# Altium PCB viper_eagle_rep_plate.PcbDoc
Units mil, origin at the board's own origin, x right, y up, seen from the top; angles counter-clockwise.
Board outline 11236.25 x 3944.87 mil, 2 copper layers (Component Side, Bottom Layer), stack 61.855 mil thick; 65 components, 206 nets, 256 pads, 0 vias.
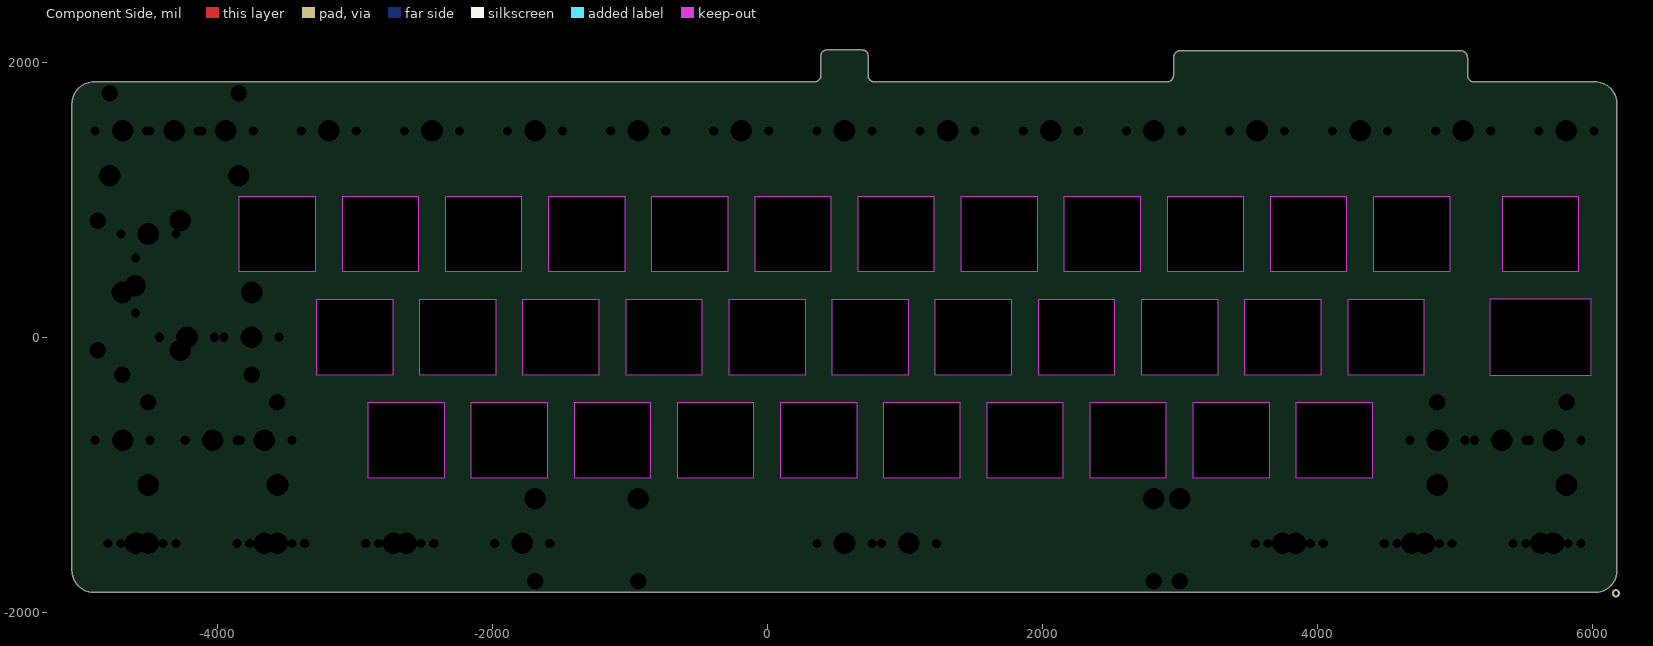
[diagram p0: Component Side view]
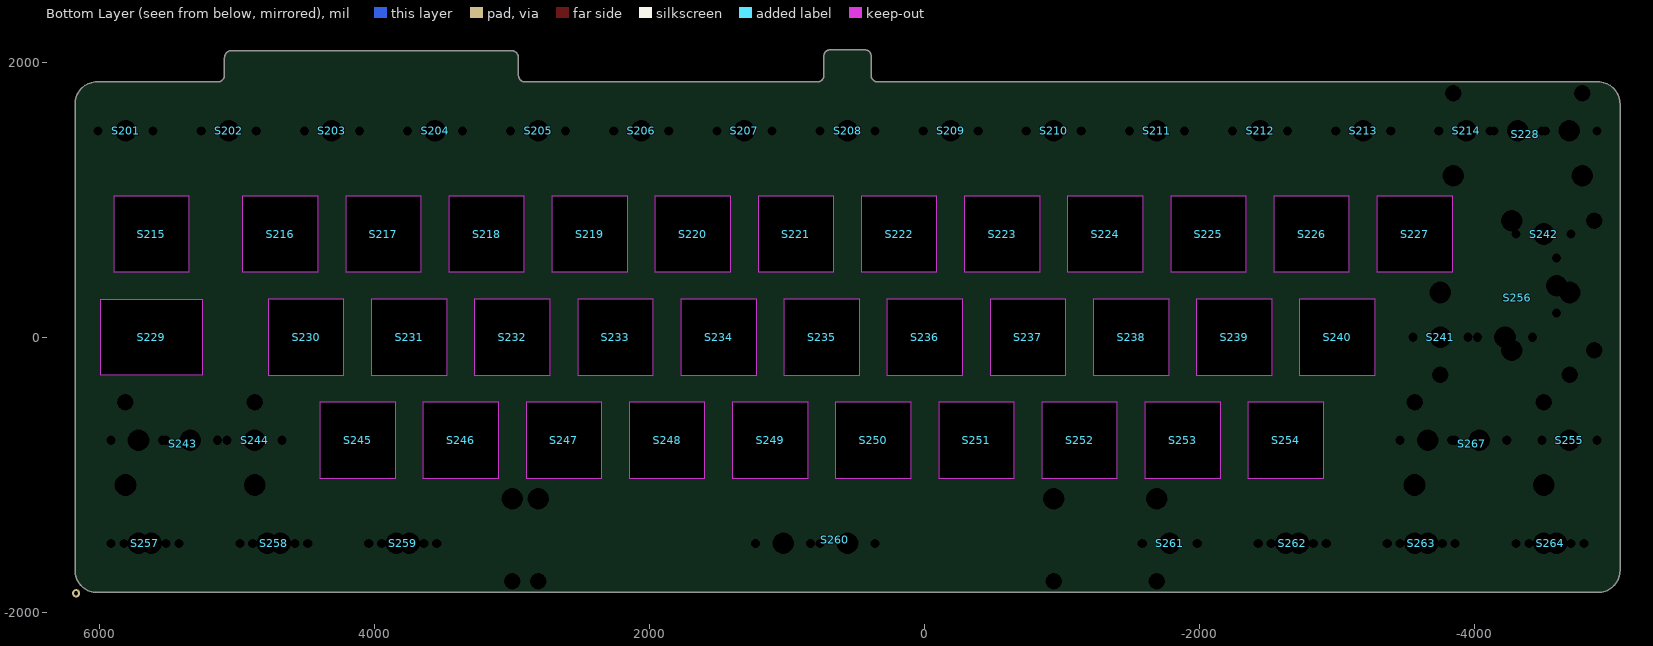
[diagram p1: Bottom Layer view, seen from below]

## Layer stack, top to bottom
Top Solder: solder mask 0.4, Solder Resist, Dk 3.5
Component Side: signal copper 1.4
Dielectric 1: core 59.0551, FR-4, Dk 4.2
Bottom Layer: signal copper 1.4
Solder Side: solder mask 0.4, Solder Resist, Dk 3.5

## Board outline
-5055.63,-1696.89 cw(c-5053.64,-1696.85) -5055.63,-1696.85 -5055.63,1696.85 cw(c-5053.64,1696.85) -5055.63,1696.88 cw(c-4896.16,1696.85) -4896.16,1856.31 cw(c-4896.16,1854.33) -4896.12,1856.31 343.21,1856.31 ccw(c343.21,1904.33) 391.23,1904.33 391.23,2047.2 cw(c432.58,2047.2) 431.97,2088.55 cw(c432.11,2086.57) 432.11,2088.56 697.11,2088.56 cw(c697.11,2086.57) 698.33,2088.13 cw(c692.42,2047.2) 733.77,2047.2 733.77,1904.33 ccw(c781.79,1904.33) 781.79,1856.31 cw(c781.79,1854.33) 781.82,1856.31 2907.74,1856.31 ccw(c2907.74,1904.33) 2955.75,1904.33 2955.75,2032.2 cw(c3007.74,2032.2) 3007.74,2084.19 5041.63,2084.19 cw(c5041.63,2032.2) 5093.62,2032.2 5093.62,1904.33 ccw(c5141.63,1904.33) 5141.61,1856.31 cw(c5141.63,1854.33) 5141.63,1856.31 6021.16,1856.31 cw(c6021.16,1696.85) 6180.63,1696.85 cw(c6178.64,1696.85) 6180.63,1696.83 6180.63,-312.79 6180.63,-324.81 ccw(c6178.64,-324.8) 6180.63,-324.8 6180.63,-324.81 6180.63,-1696.83 6180.63,-1696.85 ccw(c6178.64,-1696.85) 6180.63,-1696.83 6180.63,-1696.85 cw(c6021.16,-1696.85) 6021.2,-1856.31 cw(c6021.16,-1696.85) 6021.16,-1856.31 ccw(c6021.16,-1854.33) 6021.2,-1856.31 6021.16,-1856.31 -4896.16,-1856.32 cw(c-4896.16,-1854.33) -4896.22,-1856.31 ccw(c-4896.16,-1696.85) -4896.16,-1856.31 -4896.22,-1856.31 cw(c-4896.16,-1696.85)

## Design rules (kind name [scope] priority, off if disabled: settings)
Clearance [All] p1: gap=7.87 ignorepadtopadclearanceinfootprint=FALSE except(0: Arc-Hole Track-Hole SMDPad-Hole THPad-Hole Via-Hole Fill-Hole Poly-Hole Region-Hole Text-Hole; 10: THPad-THPad THPad-Via THPad-Fill THPad-Poly THPad-Region THPad-Text Via-Via Via-Fill Via-Poly Via-Region Via-Text Fill-Fill Fill-Poly Fill-Region Fill-Text Poly-Poly Poly-Region Poly-Text Region-Region Region-Text Text-Text)
ComponentClearance [InComponent('No Component') And OnLayer('Component Side')] p1: gap=10 collisioncheckmode=3 verticalgap=10 showdistances=FALSE
DiffPairsRouting DiffPairsRouting_USB [InDifferentialPairClass('All Differential Pairs')] p1: maxlimit=10 minlimit=8 mostfreqgap=8 toplayer_minwidth=6 toplayer_maxwidth=15 toplayer_prefwidth=6 bottomlayer_minwidth=6 bottomlayer_maxwidth=15 bottomlayer_prefwidth=6 maxuncoupledlength=500
DiffPairsRouting [All] p2: maxlimit=10 minlimit=10 mostfreqgap=10 toplayer_minwidth=15 toplayer_maxwidth=15 toplayer_prefwidth=15 bottomlayer_minwidth=15 bottomlayer_maxwidth=15 bottomlayer_prefwidth=15 maxuncoupledlength=500
HoleSize [All] p1: absolutevalues=TRUE maxlimit=787.4 minlimit=1 maxpercent=80.000 minpercent=20.000
MatchedLengths MatchedLengths_USB_DiffPairs_1 [All] p1: tolerance=5 checknetsindiffpair=TRUE checkdiffpairvsdiffpair=FALSE checkxsignals=FALSE checkothers=FALSE
MatchedLengths MatchedLengths_USB_DiffPairs [All] p2: tolerance=5 checknetsindiffpair=TRUE checkdiffpairvsdiffpair=FALSE checkxsignals=FALSE checkothers=FALSE
PolygonConnect PolygonConnect_1 [All vs IsVia] p1: connectstyle=Direct reliefconductorwidth=10 reliefentries=4 polygonreliefangle="90 Angle" airgapwidth=10
PolygonConnect [All] p2: connectstyle=Relief reliefconductorwidth=10 reliefentries=4 polygonreliefangle="90 Angle" airgapwidth=10
RoutingVias [All] p1: holewidth=28 width=50 viastyle="Through Hole" minholewidth=11.81 minwidth=23.62 maxholewidth=28 maxwidth=50
SolderMaskExpansion [All] p1: expansion=4 istentingtop=FALSE
Width [All] p1: maxlimit=196.85 minlimit=8 preferedwidth=8 minimp=50.000000 maximp=50.000000 favimp=50.000000
27 further rules are at their usual default settings.

## Classes and differential pairs
differential pair D: +D_P -D_N

## Components (designator, comment, footprint, x,y, rotation, side; value= is the part's Value field where it differs from the comment)
S201 "MX" "MX-SWITCH - SWITCHED POL" 5812.5,1500 r180 bottom
S202 "MX" "MX-switch - switched pol - connector" 5062.5,1500 r180 bottom
S203 "MX" "MX-SWITCH - SWITCHED POL" 4312.5,1500 r180 bottom
S204 "MX" "MX-switch - switched pol" 3562.5,1500 r180 bottom
S205 "MX" "MX-switch - switched pol" 2812.5,1500 r180 bottom
S206 "MX" "MX-switch - switched pol" 2062.5,1500 r180 bottom
S207 "MX" MX-switch 1312.5,1500 r180 bottom
S208 "MX" "MX-switch - switched pol" 562.5,1500 r180 bottom
S209 "MX" "MX-switch - switched pol" -187.5,1500 r180 bottom
S210 "MX" "MX-switch - switched pol" -937.5,1500 r180 bottom
S211 "MX" "MX-switch - switched pol" -1687.5,1500 r180 bottom
S212 "MX" "MX-switch - switched pol" -2437.5,1500 r180 bottom
S213 "MX" "MX-switch - switched pol" -3187.5,1500 r180 bottom
S214 "MX" MX-switch -3937.5,1500 r180 bottom
S215 "MX" Plate_MX_1U 5625,750 r180 bottom
S216 "MX" Plate_MX_1U 4687.5,750 r180 bottom
S217 "MX" Plate_MX_1U 3937.5,750 r180 bottom
S218 "MX" Plate_MX_1U 3187.5,750 r180 bottom
S219 "MX" Plate_MX_1U 2437.5,750 r180 bottom
S220 "MX" Plate_MX_1U 1687.5,750 r180 bottom
S221 "MX" Plate_MX_1U 937.5,750 r180 bottom
S222 "MX" Plate_MX_1U 187.5,750 r180 bottom
S223 "MX" Plate_MX_1U -562.5,750 r180 bottom
S224 "MX" Plate_MX_1U -1312.5,750 r180 bottom
S225 "MX" Plate_MX_1U -2062.5,750 r180 bottom
S226 "MX" Plate_MX_1U -2812.5,750 r180 bottom
S227 "MX" Plate_MX_1U -3562.5,750 r180 bottom
S228 "MX" "MX-switch - backspace" -4312.26,1500 r180 bottom
S229 "MX" "PLATE_MX - CAPS_stepped_Dual" 5531.25,0 r180 bottom
S230 "MX" Plate_MX_1U 4500,0 r180 bottom
S231 "MX" Plate_MX_1U 3750,0 r180 bottom
S232 "MX" Plate_MX_1U 3000,0 r180 bottom
S233 "MX" Plate_MX_1U 2250,0 r180 bottom
S234 "MX" Plate_MX_1U 1500,0 r180 bottom
S235 "MX" Plate_MX_1U 750,0 r180 bottom
S236 "MX" Plate_MX_1U 0,0 r180 bottom
S237 "MX" Plate_MX_1U -750,0 r180 bottom
S238 "MX" Plate_MX_1U -1500,0 r180 bottom
S239 "MX" Plate_MX_1U -2250,0 r180 bottom
S240 "MX" Plate_MX_1U -3000,0 r180 bottom
S241 "MX" MX-switch -3749.76,0 r180 bottom
S242 "MX" "MX-switch - 1.5U" -4500,750 r180 bottom
S243 "MX" "MX-SWITCH - LEFT SHIFT" 5343.75,-750 r180 bottom
S244 "MX" MX-switch 4875.1,-750 r180 bottom
S245 "MX" Plate_MX_1U 4125.01,-750 r180 bottom
S246 "MX" Plate_MX_1U 3375.01,-750 r180 bottom
S247 "MX" Plate_MX_1U 2625.01,-750 r180 bottom
S248 "MX" Plate_MX_1U 1875.01,-750 r180 bottom
S249 "MX" Plate_MX_1U 1125.01,-750 r180 bottom
S250 "MX" Plate_MX_1U 375.01,-750 r180 bottom
S251 "MX" Plate_MX_1U -374.99,-750 r180 bottom
S252 "MX" Plate_MX_1U -1124.98,-750 r180 bottom
S253 "MX" Plate_MX_1U -1874.99,-750 r180 bottom
S254 "MX" Plate_MX_1U -2624.99,-750 r180 bottom
S255 "MX" MX-switch -4687.5,-750 r180 bottom
S256 "MX" "MX-switch - Enter - rotated ISO" -4219,0 r180 bottom
S257 "MX" "MX-switch - 1.5u MOD-L" 5625,-1500 r180 bottom
S258 "MX" "MX-switch - 1u MOD-L" 4687.74,-1500 r180 bottom
S259 "MX" "MX-switch - 1.5u MOD-L" 3750.02,-1500 r180 bottom
S260 "MX" "MX-switch - Space_V2" 562.52,-1500 r180 bottom
S261 "MX" MX-switch -1781.24,-1500 r180 bottom
S262 "MX" "MX-switch - 1.5u MOD-R" -2624.98,-1500 r180 bottom
S263 "MX" "MX-switch - 1u MOD-R" -3562.26,-1500 r180 bottom
S264 "MX" "MX-switch - 1.5u MOD-R" -4499.98,-1500 r180 bottom
S267 "MX" "MX-SWITCH - RIGHT SHIFT" -4031.2,-750 r180 bottom

## Footprints (in the part's own frame and the unit in brackets; to place one, negate y for a bottom-side part, rotate by r counter-clockwise, add the part's x,y. Pads: shape width x height; smd on the part's side, far side on the other; paste and mask are expansions set on the pad)
MX-switch [mm]
  round 1 hole 1.702 unplated: ""(-5.08,0) ""(5.08,0)
  round 1 hole 3.988 unplated: ""(0,0)
"MX-switch - 1.5U" [mm]
  round 1 hole 1.702 unplated: ""(-5.08,0) ""(5.08,0)
  round 1 hole 3.988 unplated: ""(0,0)
  round 1 on Mech14: ""(0,0)
"MX-switch - 1.5u MOD-L" [mm]
  round 1 hole 1.702 unplated: ""(-7.461,0) ""(-5.08,0) ""(2.699,0) ""(5.08,0)
  round 1 on Mech14: ""(-4.763,0) ""(-2.381,0) ""(0,0) ""(4.763,0)
  round 1 hole 3.988 unplated: ""(-2.381,0) ""(0,0)
"MX-switch - 1.5u MOD-R" [mm]
  round 1 hole 1.702 unplated: ""(-5.08,0) ""(-2.699,0) ""(5.08,0) ""(7.461,0)
  round 1 on Mech14: ""(-2.381,0) ""(0,0) ""(2.381,0) ""(4.763,0)
  round 1 hole 3.988 unplated: ""(0,0) ""(2.381,0)
"MX-switch - 1u MOD-L" [mm]
  round 1 hole 1.702 unplated: ""(-7.461,0) ""(-5.08,0) ""(2.699,0) ""(5.08,0)
  round 1 hole 3.988 unplated: ""(-2.381,0) ""(0,0)
  round 1 on Mech14: ""(-2.381,0) ""(0,0) ""(2.381,0)
"MX-switch - 1u MOD-R" [mm]
  round 1 hole 1.702 unplated: ""(-5.08,0) ""(-2.699,0) ""(5.08,0) ""(7.461,0)
  round 1 on Mech14: ""(-4.763,0) ""(-2.381,0) ""(0,0) ""(2.381,0)
  round 1 hole 3.988 unplated: ""(0,0) ""(2.381,0)
"MX-switch - backspace" [mm]
  round 1.524 hole 3.988 unplated: ""(-11.938,-8.255) ""(11.938,-8.255)
  round 1.524 hole 3.048 unplated: ""(-11.938,6.985) ""(11.938,6.985)
  round 1 hole 1.702 unplated: ""(-5.08,0) ""(4.445,0) ""(5.08,0) ""(14.605,0)
  round 1 hole 3.988 unplated: ""(0,0) ""(9.525,0)
  round 1 on Mech14: ""(0,0) ""(9.525,0)
"MX-switch - Enter - rotated ISO" [mm]
  round 1.524 hole 3.048 unplated: ""(-11.938,-6.985) ""(11.938,-6.985) ""(16.515,-2.408) ""(16.515,21.468)
  round 1.524 hole 3.988 unplated: ""(-11.938,8.255) ""(1.275,-2.408) ""(1.275,21.468) ""(11.938,8.255)
  round 1 hole 1.702 unplated: ""(-5.08,0) ""(5.08,0) ""(9.53,4.45) ""(9.53,14.61)
  round 1 hole 3.988 unplated: ""(0,0) ""(9.53,9.53)
  round 1 on Mech14: ""(0,0) ""(9.53,9.53)
"MX-SWITCH - LEFT SHIFT" [mm]
  round 1 hole 1.702 unplated: ""(-14.605,0) ""(-5.08,0) ""(-4.445,0) ""(5.08,0)
  round 1.524 hole 3.988 unplated: ""(-11.938,-8.255) ""(11.938,-8.255)
  round 1.524 hole 3.048 unplated: ""(-11.938,6.985) ""(11.938,6.985)
  round 1 hole 3.988 unplated: ""(-9.525,0) ""(0,0)
  round 1 on Mech14: ""(-9.525,0) ""(0,0)
"MX-SWITCH - RIGHT SHIFT" [mm]
  round 1 hole 1.702 unplated: ""(-14.605,0) ""(-5.08,0) ""(-4.445,0) ""(5.08,0)
  round 1.524 hole 3.988 unplated: ""(-11.938,-8.255) ""(11.938,-8.255)
  round 1.524 hole 3.048 unplated: ""(-11.938,6.985) ""(11.938,6.985)
  round 1 hole 3.988 unplated: ""(-9.525,0) ""(0,0)
  round 1 on Mech14: ""(-9.525,0) ""(0,0)
"MX-switch - Space_V2" [mil]
  round 60 hole 120 unplated: ""(-2437.4,-275) ""(-2250,-275) ""(1499.61,-275) ""(2250,-275)
  round 60 hole 157.01 unplated: ""(-2437.4,325) ""(-2250,325) ""(1499.61,325) ""(2250,325)
  round 39.37 hole 67.01 unplated: ""(-668.75,0) ""(-268.75,0) ""(-200,0) ""(200,0)
  round 39.37 hole 157.01 unplated: ""(-468.75,0) ""(0,0)
  round 39.37 on Mech14: ""(-468.75,0) ""(0,0)
"MX-SWITCH - SWITCHED POL" [mm]
  round 1 hole 1.702 unplated: ""(-5.08,0) ""(5.08,0)
  round 1 hole 3.988 unplated: ""(0,0)
"MX-switch - switched pol" [mm]
  round 1 hole 1.702 unplated: ""(-5.08,0) ""(5.08,0)
  round 1 hole 3.988 unplated: ""(0,0)
"MX-switch - switched pol - connector" [mm]
  round 1 hole 1.702 unplated: ""(-5.08,0) ""(5.08,0)
  round 1 hole 3.988 unplated: ""(0,0)
"PLATE_MX - CAPS_stepped_Dual" [mm]
  round 1 on Mech14: ""(-4.763,0) ""(0,0)
  Keep-Out Layer board cut-out: -11.763,-7 -11.762,7 7,7 7,-7
Plate_MX_1U [mm]
  round 1 on Mech14: ""(0,0) ""(0,0)
  Component Side pour cut-out: -7,-7 7,-7 7,7 -7,7
  Keep-Out Layer board cut-out: -7,-7 7,-7 7,7 -7,7

## Part data
S201 S202 S203 S204 S205 S206 S207 S208 S209 S210 S211 S212 S213 S214 S216 S217 S218 S219 S220 S221 S222 S223 S224 S225 S226 S227 S228 S229 S230 S231 S232 S233 S234 S235 S236 S237 S238 S239 S240 S241 S242 S243 S244 S245 S246 S247 S248 S249 S250 S251 S252 S253 S254 S255 S256 S257 S258 S259 S260 S261 S262 S263 S264 S267: library part SW-PB, "Switch"
S215: library part SW-PB, "TAB"

## Free pads (board coordinates)
  round 60 hole 30: ORIGIN(6172.74,-1862.8)

## Nets (pads, with @x,y where several pads share a name; then routed paths per layer and width w, separated by ;. In a path a pad name is that pad's centre, name@x,y a point inside that pad or via, vN(x,y) a via of type N, cw(c..) or ccw(c..) an arc to the next point about the centre after c; other vN are vias at no path point)
BOOT0: 
col1: 
col2: 
col3: 
col4: 
col5: 
col6: 
col7: 
D_N: 
D_P: 
GND: 
led1: 
led2: 
led3: 
led4: 
led5: 
led6: 
led7: 
led8: 
NetC307_2: 
NetC308_2: 
NetCON401_1: 
NetD201_1: 
NetD202_1: 
NetD203_1: 
NetD204_1: 
NetD205_1: 
NetD206_1: 
NetD207_1: 
NetD208_1: 
NetD209_1: 
NetD210_1: 
NetD211_1: 
NetD212_1: 
NetD213_1: 
NetD214_1: 
NetD215_1: 
NetD216_1: 
NetD217_1: 
NetD218_1: 
NetD219_1: 
NetD220_1: 
NetD221_1: 
NetD222_1: 
NetD223_1: 
NetD224_1: 
NetD225_1: 
NetD226_1: 
NetD227_1: 
NetD228_1: 
NetD229_1: 
NetD230_1: 
NetD231_1: 
NetD232_1: 
NetD233_1: 
NetD234_1: 
NetD235_1: 
NetD236_1: 
NetD237_1: 
NetD238_1: 
NetD239_1: 
NetD240_1: 
NetD241_1: 
NetD242_1: 
NetD243_1: 
NetD244_1: 
NetD245_1: 
NetD246_1: 
NetD247_1: 
NetD248_1: 
NetD249_1: 
NetD250_1: 
NetD251_1: 
NetD252_1: 
NetD253_1: 
NetD254_1: 
NetD255_1: 
NetD256_1: 
NetD257_1: 
NetD258_1: 
NetD259_1: 
NetD260_1: 
NetD261_1: 
NetD262_1: 
NetD263_1: 
NetD264_1: 
NetD267_1: 
NetD401_1: 
NetD402_1: 
NetD403_1: 
NetD404_1: 
NetD405_1: 
NetD406_1: 
NetD407_1: 
NetD408_1: 
NetD501_2: 
NetD502_2: 
NetD503_2: 
NetD504_2: 
NetD505_2: 
NetD506_2: 
NetD507_2: 
NetD508_2: 
NetD509_2: 
NetD510_2: 
NetD511_2: 
NetD512_2: 
NetD513_2: 
NetD514_2: 
NetD515_2: 
NetD516_2: 
NetD517_2: 
NetD518_2: 
NetD519_2: 
NetD520_2: 
NetD521_2: 
NetD522_2: 
NetD523_2: 
NetD524_2: 
NetD525_2: 
NetD526_2: 
NetD527_2: 
NetD528_1_2: 
NetD528_2_2: 
NetD529_2: 
NetD530_2: 
NetD531_2: 
NetD532_2: 
NetD533_2: 
NetD534_2: 
NetD535_2: 
NetD536_2: 
NetD537_2: 
NetD538_2: 
NetD539_2: 
NetD540_2: 
NetD541_2: 
NetD542_2: 
NetD543_2: 
NetD544_1_2: 
NetD544_2_2: 
NetD545_2: 
NetD546_2: 
NetD547_2: 
NetD548_2: 
NetD549_2: 
NetD550_2: 
NetD551_2: 
NetD552_2: 
NetD553_2: 
NetD554_2: 
NetD555_2: 
NetD556_1_2: 
NetD556_2_2: 
NetD557_2: 
NetD558_2: 
NetD559_2: 
NetD561_1_2: 
NetD561_2_2: 
NetD563_2: 
NetD564_2: 
NetD565_2: 
NetD566_2: 
NetD567_1_2: 
NetD567_2_2: 
NetF301_1: 
NetLED401_2: 
NetLED401_4: 
NetLED402_2: 
NetLED403_2: 
NetLED404_2: 
NetLED406_2: 
NetLED406_4: 
NetLED407_2: 
NetLED408_2: 
NetLED409_2: 
NetLED410_2: 
NetLED411_2: 
NetLED412_2: 
NetLED413_2: 
NetLED414_2: 
NetLED415_2: 
NetQ301_1: 
NetQ501_1: 
NetQ502_1: 
NRST: 
PA1: 
PA2: 
PA3: 
"PA7 - MOSI": 
PA10: 
PA13/SWDIO: 
PA14/SWCLK: 
PA15: 
PB6: 
PB7: 
PB8: 
PB10: 
PB11: 
PC13: 
PC14: 
PC15: 
RAW: 
VCC3V3: 
VCC5V: 
VCC_EXT: 
pads on no net: S201. S202. S203. S204. S205. S206. S207. S208. S209. S210. S211. S212. S213. S214. S215. S216. S217. S218. S219. S220. S221. S222. S223. S224. S225. S226. S227. S228. S229. S230. S231. S232. S233. S234. S235. S236. S237. S238. S239. S240. S241. S242. S243. S244. S245. S246. S247. S248. S249. S250. S251. S252. S253. S254. S255. S256. S257. S258. S259. S260. S261. S262. S263. S264. S267.

## Silkscreen, mask and mechanical layers (free items; w line width, h text height)
outline:
  lines w3.94: 432.11,2086.57 697.11,2086.57 ; 432.58,2086.57 ccw(c432.58,2047.2) 393.21,2047.2 393.21,1904.33 cw(c343.21,1904.33) 343.21,1854.33 -4896.16,1854.33 ccw(c-4896.16,1696.85) -5053.64,1696.85 -5053.64,-1696.85 ccw(c-4896.16,-1696.85) -4896.16,-1854.33 6021.16,-1854.33 ccw(c6021.16,-1696.85) 6178.64,-1696.85 6178.64,-312.8 ; 692.42,2086.57 cw(c692.42,2047.2) 731.79,2047.2 731.79,1904.33 ccw(c781.79,1904.33) 781.79,1854.33 2907.74,1854.33 ccw(c2907.74,1904.33) 2957.74,1904.33 2957.74,2019.7 ; 2957.74,2007.2 2957.74,2032.2 cw(c3007.74,2032.2) 3007.74,2082.2 5041.63,2082.2 cw(c5041.63,2032.2) 5091.63,2032.2 5091.63,1997.2 ; 2957.78,1952.2 2957.78,1997.2 ; 6178.64,-324.8 6178.64,1696.85 ccw(c6021.16,1696.85) 6021.16,1854.33 5141.63,1854.33 cw(c5141.63,1904.33) 5091.63,1904.33 5091.63,1997.2 ; 5091.63,1997.2 5091.63,1997.2
Mechanical 2:
  lines w3.94: 432.11,2086.57 697.11,2086.57 ; 432.58,2086.57 ccw(c432.58,2047.2) 393.21,2047.2 393.21,1904.33 cw(c343.21,1904.33) 343.21,1854.33 -4896.16,1854.33 ccw(c-4896.16,1696.85) -5053.64,1696.85 -5053.64,-1696.85 ccw(c-4896.16,-1696.85) -4896.16,-1854.33 6021.16,-1854.33 ccw(c6021.16,-1696.85) 6178.64,-1696.85 6178.64,-312.8 ; 692.42,2086.57 cw(c692.42,2047.2) 731.79,2047.2 731.79,1904.33 ccw(c781.79,1904.33) 781.79,1854.33 2907.74,1854.33 ccw(c2907.74,1904.33) 2957.74,1904.33 2957.74,2019.7 ; 2957.74,2007.2 2957.74,2032.2 cw(c3007.74,2032.2) 3007.74,2082.2 5041.63,2082.2 cw(c5041.63,2032.2) 5091.63,2032.2 5091.63,1997.2 ; 2957.78,1952.2 2957.78,1997.2 ; 6178.64,-324.8 6178.64,1696.85 ccw(c6021.16,1696.85) 6021.16,1854.33 5141.63,1854.33 cw(c5141.63,1904.33) 5091.63,1904.33 5091.63,1997.2 ; 5091.63,1997.2 5091.63,1997.2
  lines w10: 487.74,2182.68 642.74,2182.68
Mechanical 16:
  drawing of 556 lines, arcs and shapes, not listed

## Text inside footprints (layer, text, board x,y; h text height)
S260: Mechanical 16 "6.25U" at -1258.94,-1641.73 h60 r270; Mechanical 16 "7U" at -2029.26,-1572.83 h60 r270